# EAGLE board Spikeling PCB (EAGLE 8.2.2)
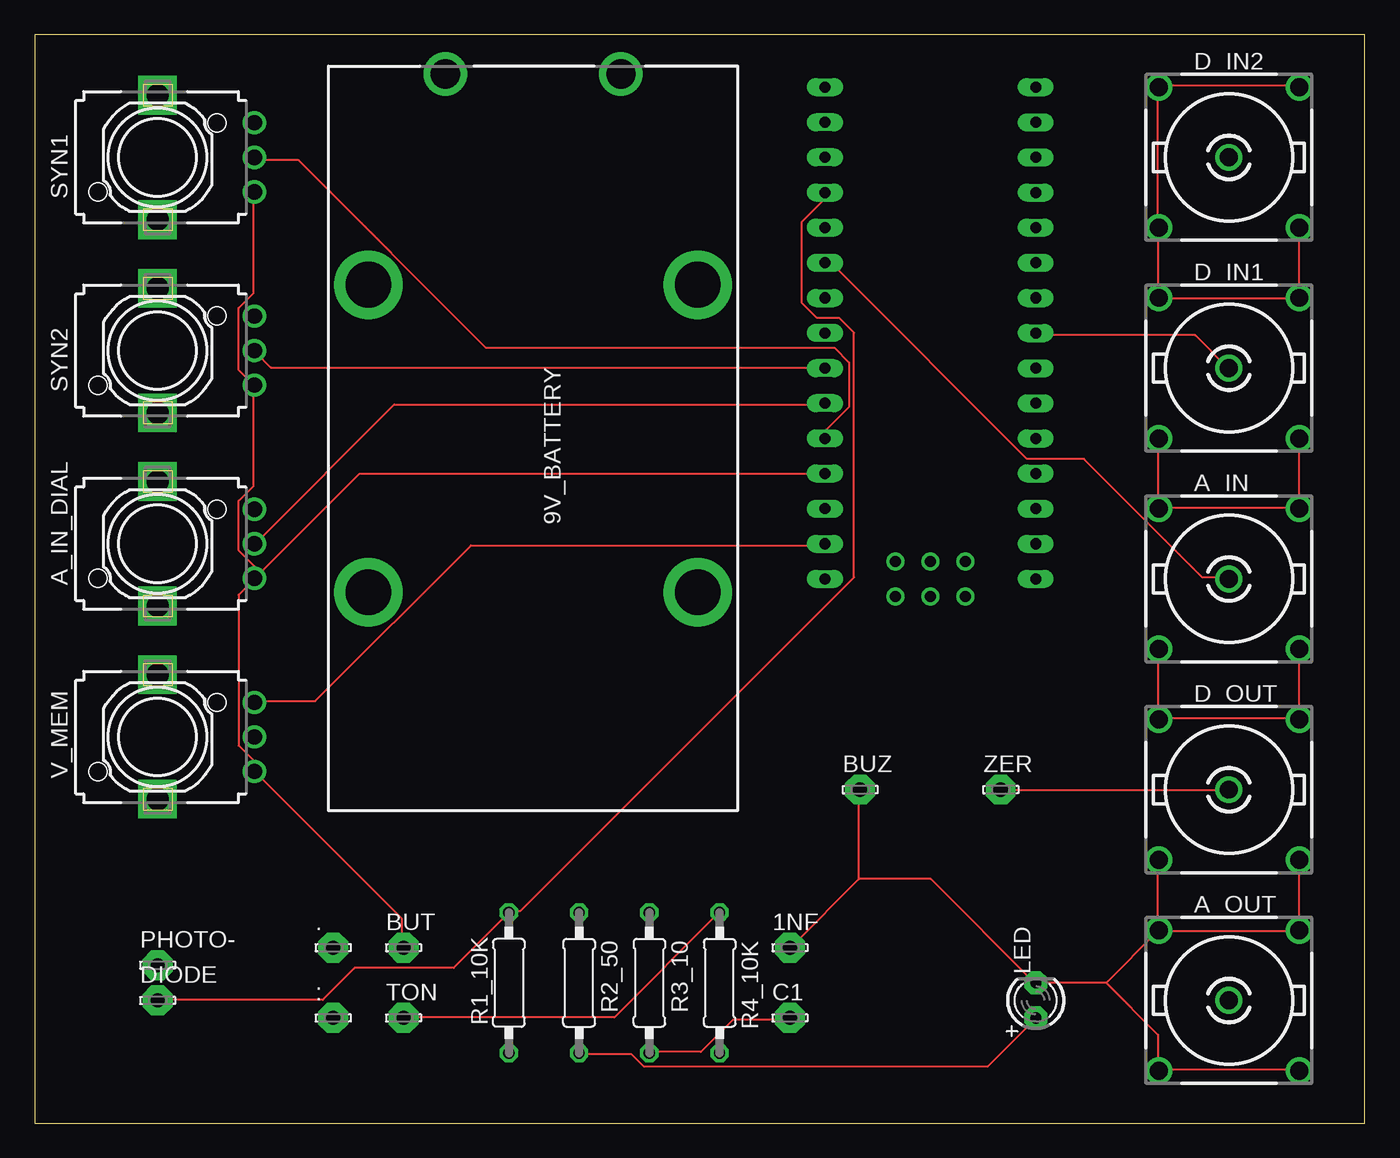
[diagram p0: board, top side]
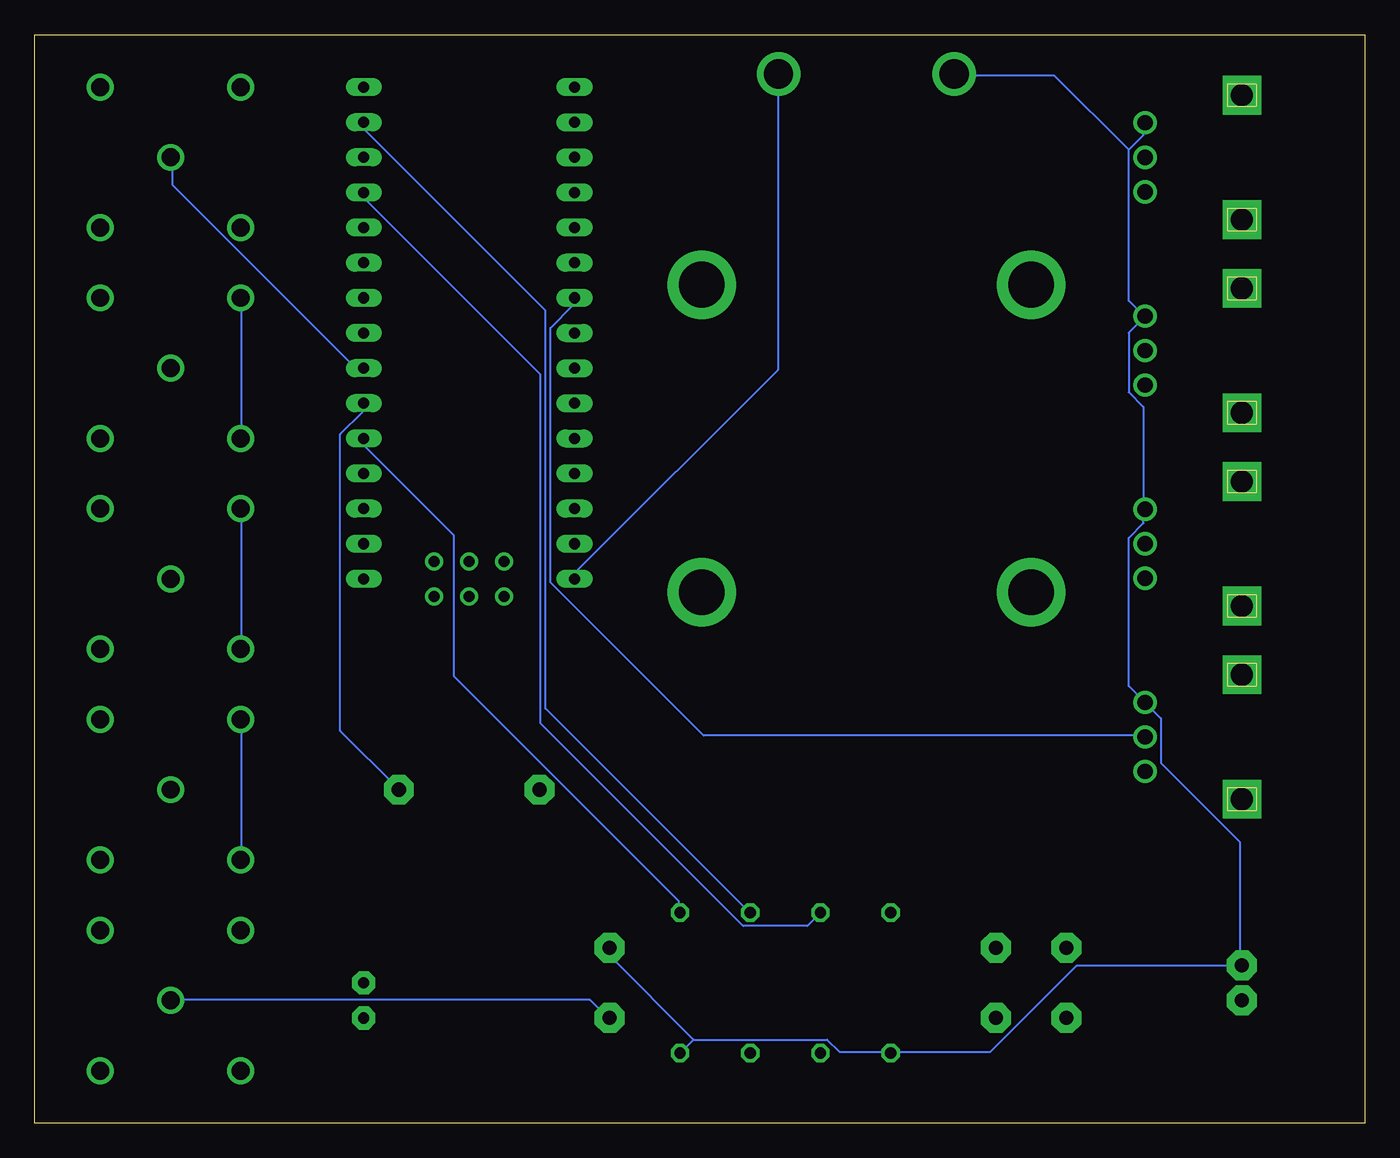
[diagram p1: board, bottom side, seen from below]

Size 96.19 x 78.73 mm. Coordinates in mm from the lower left corner, seen from the top.
Outline: 0,0 96.19,0 96.19,78.73 0,78.73 0,0
Copper layers (1*16): Top 0.035mm / dielectric 1.5mm / Bottom 0.035mm
Design rules "default": minimum track width 6mil, minimum drill 0.35mm, track to track 6mil, track to pad 6mil, pad to pad 6mil, via to via 6mil, smd to smd 6mil, copper to edge 40mil, drill to drill 6mil, minimum pad ring 10mil, minimum via ring 8mil, stop-mask expansion 4mil, vias tented up to drill 0mil, thermal gap 10mil
Net classes: 0 default: clearance 0.205 mm

## Footprints (pad centres in the part's own frame; a part is rotated, then mirrored left to right if it is on the bottom)
LSP10 = drill 1.016 pad 2.159 octagon: MP 0,0
1294 = drill 2.11 pad 3.16: 1 -26.355,18.265; 2 -26.355,5.565 | drill 3.3 pad 4.95: 3 -11.115,23.83; 4 -11.115,0; 5 11.115,23.83; 6 11.115,0
R141426 = drill 1.295: 1 0,0; 2 5.08,5.08; 3 -5.08,5.08; 4 -5.08,-5.08; 5 5.08,-5.08
EVUFXL = drill 1.1 pad 1.676: 1 -2.5,-7; 2 0,-7; 3 2.5,-7 | drill 1.6 pad 2.8 square: M1 4.5,0; M2 -4.5,0
LED3MM = drill 0.813 pad 1.676 octagon: A -1.27,0; K 1.27,0
0207/10 = drill 0.813 octagon: 1 -5.08,0; 2 5.08,0
NANO = drill 0.8 long: 3.3V -10.16,24.13; 5V -10.16,-1.27; A0 -10.16,19.05; A1 -10.16,16.51; A2 -10.16,13.97; A3 -10.16,11.43; A4 -10.16,8.89; A5 -10.16,6.35; A6 -10.16,3.81; A7 -10.16,1.27; AREF -10.16,21.59; D2 5.08,1.27; D3 5.08,3.81; D4 5.08,6.35; D5 5.08,8.89; D6 5.08,11.43; D7 5.08,13.97; D8 5.08,16.51; D9 5.08,19.05; D10 5.08,21.59; D11 5.08,24.13; D12 5.08,26.67; D13 -10.16,26.67; GND -10.16,-6.35; GND1 5.08,-1.27; RAW -10.16,-8.89; RST -10.16,-3.81; RST1 5.08,-3.81; RX1 5.08,-6.35; TX0 5.08,-8.89 | drill 0.8: ICSP1 -5.08,-10.16; ICSP2 -5.08,-7.62; ICSP3 -2.54,-10.16; ICSP4 -2.54,-7.62; ICSP5 0,-10.16; ICSP6 0,-7.62

## Placement (x,y rotation side)
1NF  LSP10  [LSP10]  54.61,12.7 0 top
9V_BATTERY  [1294]  24.13,49.53 270 top
.  LSP10  [LSP10]  21.59,12.7 0 top
:  LSP10  [LSP10]  21.59,7.62 0 top
A_IN  BNC  [R141426]  86.36,39.37 0 top
A_IN_DIAL  [EVUFXL]  8.89,41.91 90 top
A_OUT  BNC  [R141426]  86.36,8.89 0 top
BUT  LSP10  [LSP10]  26.67,12.7 0 top
BUZ  LSP10  [LSP10]  59.69,24.13 0 top
C1  LSP10  [LSP10]  54.61,7.62 0 top
D_IN1  BNC  [R141426]  86.36,54.61 0 top
D_IN2  BNC  [R141426]  86.36,69.85 0 top
D_OUT  BNC  [R141426]  86.36,24.13 0 top
DIODE  LSP10  [LSP10]  8.89,8.89 0 top
LED  [LED3MM]  72.39,8.89 90 top
PHOTO-  LSP10  [LSP10]  8.89,11.43 0 top
R1_10K  220  [0207/10]  34.29,10.16 90 top
R2_50  50  [0207/10]  39.37,10.16 270 top
R3_10  10  [0207/10]  44.45,10.16 270 top
R4_10K  10k  [0207/10]  49.53,10.16 270 top
SYN1  [EVUFXL]  8.89,69.85 90 top
SYN2  [EVUFXL]  8.89,55.88 90 top
TON  LSP10  [LSP10]  26.67,7.62 0 top
U$1  NANO  [NANO]  67.31,48.26 0 top
V_MEM  [EVUFXL]  8.89,27.94 90 top
ZER  LSP10  [LSP10]  69.85,24.13 0 top

## Library data of the parts
1NF . : BUT BUZ C1 DIODE PHOTO- TON ZER = solpad
9V_BATTERY = 1294; ALLIED_NUMBER: 70182303; DESCRIPTION: BATTERY HOLDER PP3 Keystone PCB Mount Battery Holder for 1, Solder Tag Contact; HEIGHT: mm; MANUFACTURER_NAME: Keystone Electronics; MANUFACTURER_PART_NUMBER: 1294; RS_PART_NUMBER: 1725845; SUPPLIER_NAME: RS
A_IN A_OUT D_IN1 D_IN2 D_OUT = con-coax; MF: FARNELL; MPN: R141426161; OC_FARNELL: 4195115; OC_NEWARK: 14J7919
A_IN_DIAL SYN1 SYN2 V_MEM = pot
LED = adafruit
R1_10K R2_50 R3_10 R4_10K = eagle-ltspice; SPICEMODEL: NONE; SPICEPREFIX: R
U$1 = Arduino-clone

## Nets
GND: 1NF.MP 9V_BATTERY.2 A_IN.2 A_IN.3 A_IN.4 A_IN.5 A_IN_DIAL.3 A_OUT.2 A_OUT.3 A_OUT.4 A_OUT.5 BUZ.MP D_IN1.2 D_IN1.3 D_IN1.4 D_IN1.5 D_IN2.2 D_IN2.3 D_IN2.4 D_IN2.5 D_OUT.2 D_OUT.3 D_OUT.4 D_OUT.5 LED.K PHOTO-.MP R1_10K.1 R4_10K.2 SYN1.3 SYN2.3 U$1.GND V_MEM.3
N$1: R3_10.1 U$1.D11
N$2: A_OUT.1 C1.MP R3_10.2
N$3: DIODE.MP R1_10K.2 U$1.A0
N$4: R2_50.1 U$1.D9
N$5: LED.A R2_50.2
N$6: 9V_BATTERY.1 U$1.RAW
N$7: U$1.A3 V_MEM.2
N$8: D_IN2.1 U$1.D4
N$9: R4_10K.1 TON.MP U$1.D2
N$10: D_OUT.1 U$1.D3 ZER.MP
N$11: D_IN1.1 U$1.D5
N$12: SYN1.2 U$1.A7
N$13: A_IN_DIAL.2 U$1.A6
N$14: A_IN.1 U$1.A2
N$15: SYN2.2 U$1.A5
N$16: A_IN_DIAL.1 BUT.MP SYN1.1 SYN2.1 U$1.5V V_MEM.1

## Tracks (layer width: path | path; a pad name or v marks a point on that pad's centre or on a via)
GND
  Top 0.152: U$1.GND 57.11,41.8 31.55,41.8 20.3,30.54 16.01,30.54 V_MEM.3 | 59.61,17.67 59.61,24.11 BUZ.MP | 59.61,17.67 54.78,12.85 1NF.MP | D_IN2.2 91.42,75.04 81.41,75.04 D_IN2.3 81.23,74.86 81.23,64.85 D_IN2.4 81.23,64.67 81.23,59.84 D_IN1.3 81.41,59.67 91.42,59.67 D_IN1.2 91.42,59.84 91.42,64.67 D_IN2.5 | D_IN1.4 81.23,49.48 81.23,44.48 A_IN.3 81.41,44.48 91.42,44.48 | 91.42,44.48 91.42,49.48 D_IN1.5 | 91.42,44.48 A_IN.2 | A_IN.4 81.23,34.11 81.23,29.29 D_OUT.3 81.41,29.29 91.42,29.29 | 91.42,29.29 91.42,34.11 A_IN.5 | 91.42,29.29 D_OUT.2 | D_OUT.5 91.42,18.92 91.42,14.1 A_OUT.2 91.42,13.92 81.41,13.92 A_OUT.3 | 77.48,10.17 72.48,10.17 LED.K 72.3,10.17 64.79,17.67 59.61,17.67 | 77.48,10.17 81.23,13.92 A_OUT.3 | 77.48,10.17 81.23,6.41 81.23,3.91 A_OUT.4 81.41,3.91 91.42,3.91 A_OUT.5 | D_OUT.4 81.23,18.92 81.23,14.1 A_OUT.3
  Bottom 0.152: 17.08,70.39 16.01,71.46 16.01,72.18 SYN1.3 | 17.08,70.39 17.08,59.49 16.01,58.42 SYN2.3 16.01,58.24 17.08,57.16 17.08,52.88 16.01,51.8 16.01,44.48 A_IN_DIAL.3 16.01,44.3 16.01,43.4 17.08,42.33 17.08,31.61 16.01,30.54 V_MEM.3 15.83,30.36 14.76,29.29 14.76,26.07 9.04,20.35 9.04,11.6 PHOTO-.MP 9.04,11.42 20.83,11.42 27.09,5.16 34.23,5.16 R1_10K.1 34.41,5.16 37.99,5.16 38.88,6.06 48.53,6.06 | 17.08,70.39 22.44,75.75 29.59,75.75 9V_BATTERY.2 | 48.53,6.06 49.42,5.16 R4_10K.2 | 48.53,6.06 54.61,12.13 54.61,12.67 1NF.MP | D_IN1.3 81.23,59.67 81.23,49.66 D_IN1.4 | D_OUT.3 81.23,29.11 81.23,19.1 D_OUT.4 | A_IN.3 81.23,44.3 81.23,34.29 A_IN.4
N$1
  Bottom 0.152: U$1.D11 72.3,72.35 72.3,71.82 59.25,58.77 59.25,30 44.6,15.35 R3_10.1
N$2
  Top 0.152: R3_10.2 44.6,5.16 48.17,5.16 50.5,7.49 54.61,7.49 C1.MP
  Bottom 0.152: A_OUT.1 86.24,8.92 56.04,8.92 54.78,7.67 C1.MP
N$3
  Top 0.152: U$1.A0 57.11,67.17 57.11,66.81 55.5,65.21 55.5,59.31 56.57,58.24 58.18,58.24 59.25,57.16 59.25,39.47 35.13,15.35 34.41,15.35 R1_10K.2 34.23,15.17 30.3,11.24 23.16,11.24 20.83,8.92 9.04,8.92 DIODE.MP
N$4
  Bottom 0.152: U$1.D9 72.3,67.17 72.3,66.81 59.61,54.13 59.61,28.93 44.96,14.28 40.31,14.28 39.42,15.17 R2_50.1
N$5
  Top 0.152: R2_50.2 39.42,4.98 43.17,4.98 44.06,4.09 68.9,4.09 72.3,7.49 LED.A
N$6
  Bottom 0.152: U$1.RAW 57.11,39.47 57.11,39.83 42.45,54.48 42.45,75.75 9V_BATTERY.1
N$7
  Bottom 0.152: U$1.A3 57.29,59.67 57.29,59.13 58.9,57.52 58.9,39.12 47.82,28.04 16.01,28.04 V_MEM.2
N$8
  Bottom 0.152: U$1.D4 72.48,54.66 73.01,54.66 86.24,67.89 86.24,69.67 D_IN2.1
N$9
  Top 0.152: TON.MP 26.73,7.67 41.92,7.67 49.42,15.17 R4_10K.1
  Bottom 0.152: U$1.D2 72.3,49.48 72.3,48.95 65.86,42.51 65.86,32.33 49.6,16.06 49.6,15.35 R4_10K.1
N$10
  Top 0.152: D_OUT.1 86.24,24.11 69.97,24.11 ZER.MP
  Bottom 0.152: U$1.D3 72.48,51.98 72.48,51.45 74.08,49.84 74.08,28.39 69.97,24.28 ZER.MP
N$11
  Top 0.152: U$1.D5 72.48,56.99 83.91,56.99 86.24,54.66 D_IN1.1
N$12
  Top 0.152: U$1.A7 57.29,49.66 57.29,50.2 58.9,51.8 58.9,55.02 57.82,56.09 32.63,56.09 19.05,69.67 16.01,69.67 SYN1.2
N$13
  Top 0.152: U$1.A6 57.11,51.98 26.01,51.98 16.01,41.97 A_IN_DIAL.2
N$14
  Top 0.152: U$1.A2 57.29,62.17 57.64,62.17 71.76,48.05 75.87,48.05 84.45,39.47 86.24,39.47 A_IN.1
N$15
  Top 0.152: U$1.A5 57.11,54.66 17.08,54.66 16.01,55.73 SYN2.2
N$16
  Top 0.152: 16.36,39.83 16.01,39.47 A_IN_DIAL.1 | 16.36,39.83 23.51,46.98 57.11,46.98 U$1.5V | A_IN_DIAL.1 15.83,39.29 14.76,38.22 14.76,27.32 15.83,26.25 15.83,25.54 V_MEM.1 16.01,25.36 26.55,14.81 26.55,12.85 BUT.MP | 16.36,39.83 14.76,41.44 14.76,45.01 15.83,46.08 15.83,53.23 SYN2.1 15.83,53.41 14.76,54.48 14.76,58.95 15.83,60.02 15.83,67.17 SYN1.1 | 16.36,39.83 A_IN_DIAL.1